# Altium PCB RJ45-TH_HR911105A.pcbdoc
Units mm, origin at the board's own origin, x right, y up, seen from the top; angles counter-clockwise.
Board outline 30.69 x 34.3 mm, 2 copper layers (Top Layer, Bottom Layer); 1 components, 0 nets, 14 pads, 0 vias.
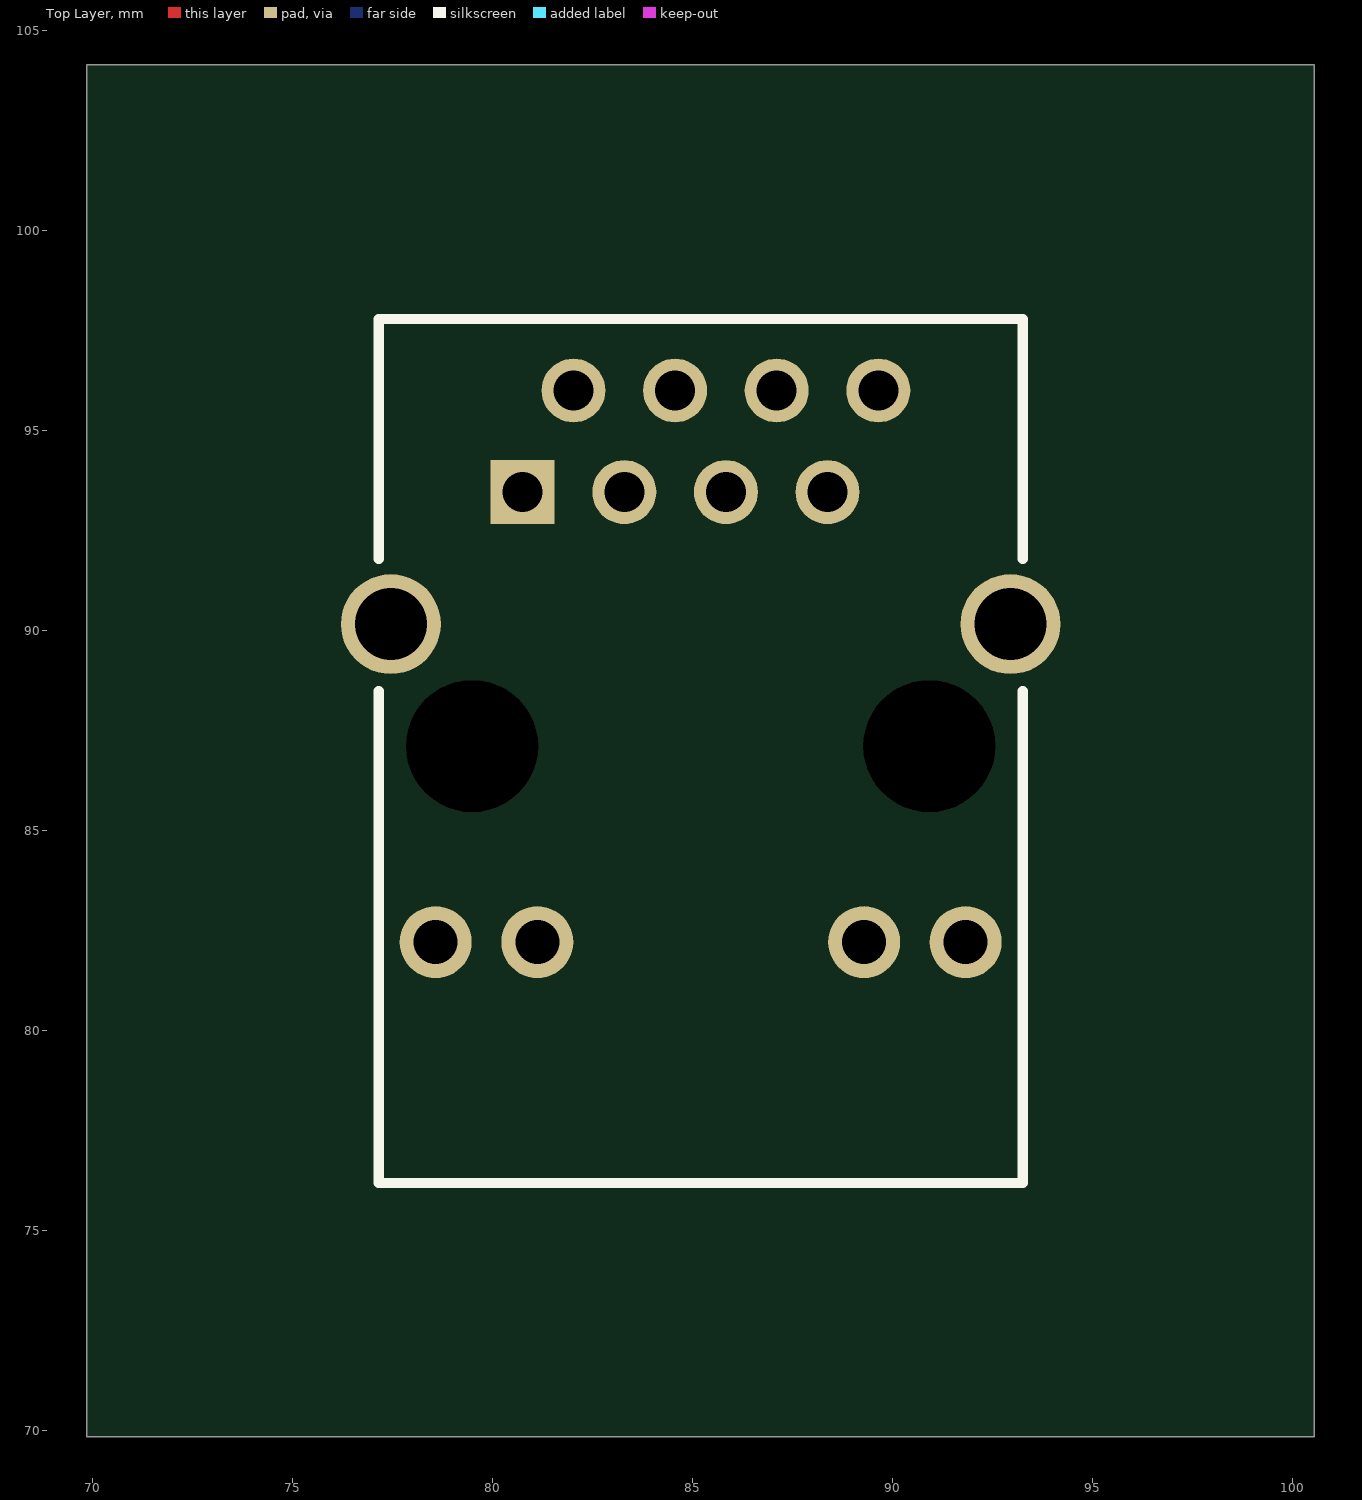
[diagram p0: Top Layer view]
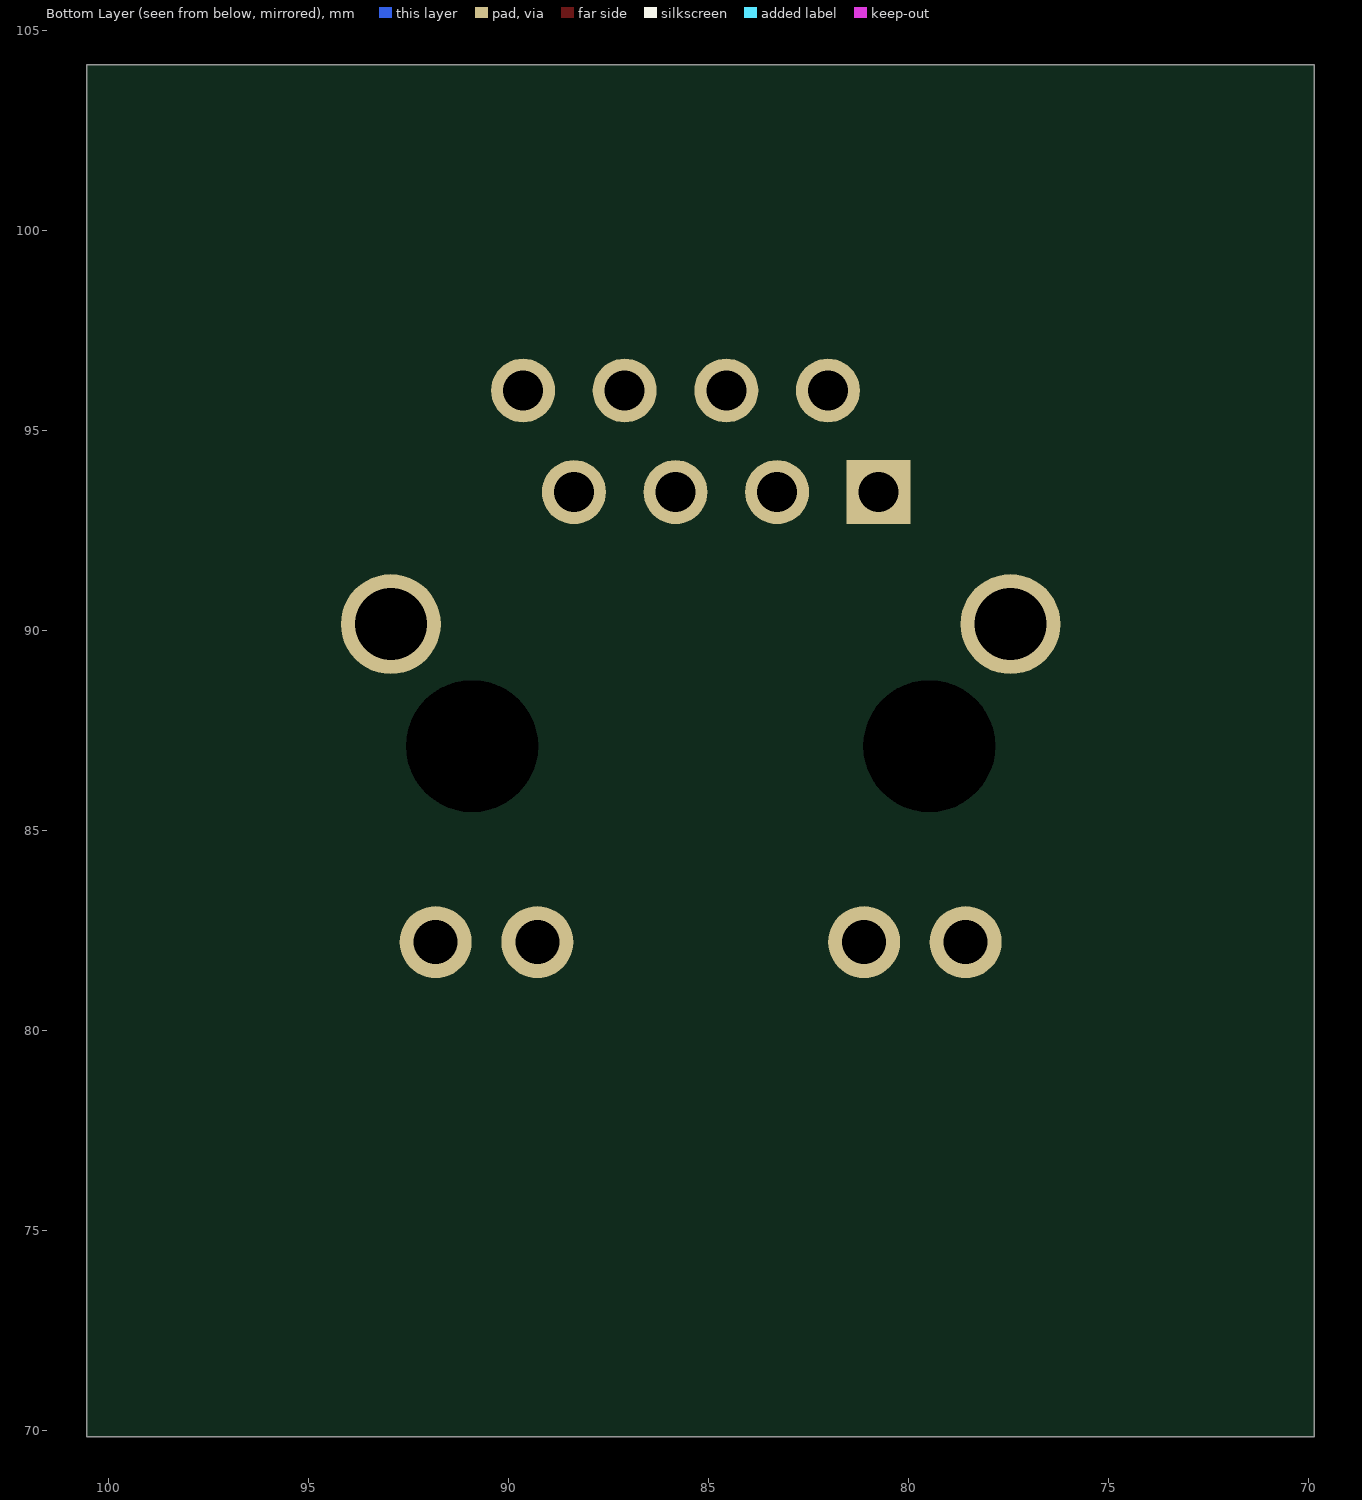
[diagram p1: Bottom Layer view, seen from below]

## Layer stack, top to bottom
Top Layer: signal copper (thickness not stored)
Dielectric: dielectric 0.32, FR-4, Dk 4.8
Bottom Layer: signal copper (thickness not stored)

## Board outline
100.54,69.85 69.85,69.85 69.85,104.15 100.54,104.15

## Components (designator, comment, footprint, x,y, rotation, side; value= is the part's Value field where it differs from the comment)
? "RJ45-TH_HR911105A" RJ45-TH_HR911105A 85.195,89.115 r0 top

## Footprints (in the part's own frame and the unit in brackets; to place one, negate y for a bottom-side part, rotate by r counter-clockwise, add the part's x,y. Pads: shape width x height; smd on the part's side, far side on the other; paste and mask are expansions set on the pad)
RJ45-TH_HR911105A [mm]
  rect 1.6x1.6 hole 1: 1(-4.45,4.355)
  round 1.6 hole 1: 2(-3.18,6.895) 3(-1.91,4.355) 4(-0.64,6.895) 5(0.63,4.355) 6(1.9,6.895) 7(3.17,4.355) 8(4.44,6.895)
  round 1.8 hole 1.1: 9(-6.625,-6.895) 10(-4.085,-6.895) 11(4.085,-6.895) 12(6.625,-6.895)
  round 2.5 hole 1.8: SH1(-7.745,1.055) SH2(7.745,1.055)
  Multi-Layer board cut-out: -4.065,-1.995 -4.228,-1.279 -4.686,-0.705 -5.348,-0.386 -6.082,-0.386 -6.744,-0.705 -7.202,-1.279 -7.365,-1.995 -7.365,-1.995 -7.202,-2.711 -6.744,-3.285 -6.082,-3.604 -5.348,-3.604 -4.686,-3.285 -4.228,-2.711 -4.065,-1.995
  Multi-Layer board cut-out: 7.365,-1.995 7.202,-1.279 6.744,-0.705 6.082,-0.386 5.348,-0.386 4.686,-0.705 4.228,-1.279 4.065,-1.995 4.065,-1.995 4.228,-2.711 4.686,-3.285 5.348,-3.604 6.082,-3.604 6.744,-3.285 7.202,-2.711 7.365,-1.995
  silkscreen extent -8.05,-12.92 8.05,8.68

## Nets (pads, with @x,y where several pads share a name; then routed paths per layer and width w, separated by ;. In a path a pad name is that pad's centre, name@x,y a point inside that pad or via, vN(x,y) a via of type N, cw(c..) or ccw(c..) an arc to the next point about the centre after c; other vN are vias at no path point)
pads on no net: ?.1 ?.2 ?.3 ?.4 ?.5 ?.6 ?.7 ?.8 ?.9 ?.10 ?.11 ?.12 ?.SH1 ?.SH2